# Altium PCB 复件 PCB3.PcbDoc
Units mil, origin at the board's own origin, x right, y up, seen from the top; angles counter-clockwise.
Board outline 3977.39 x 3970.06 mil, 2 copper layers (Top Layer, Bottom Layer); 98 components, 76 nets, 361 pads, 8 vias.
Unrouted connection lines stored in the file: 220.
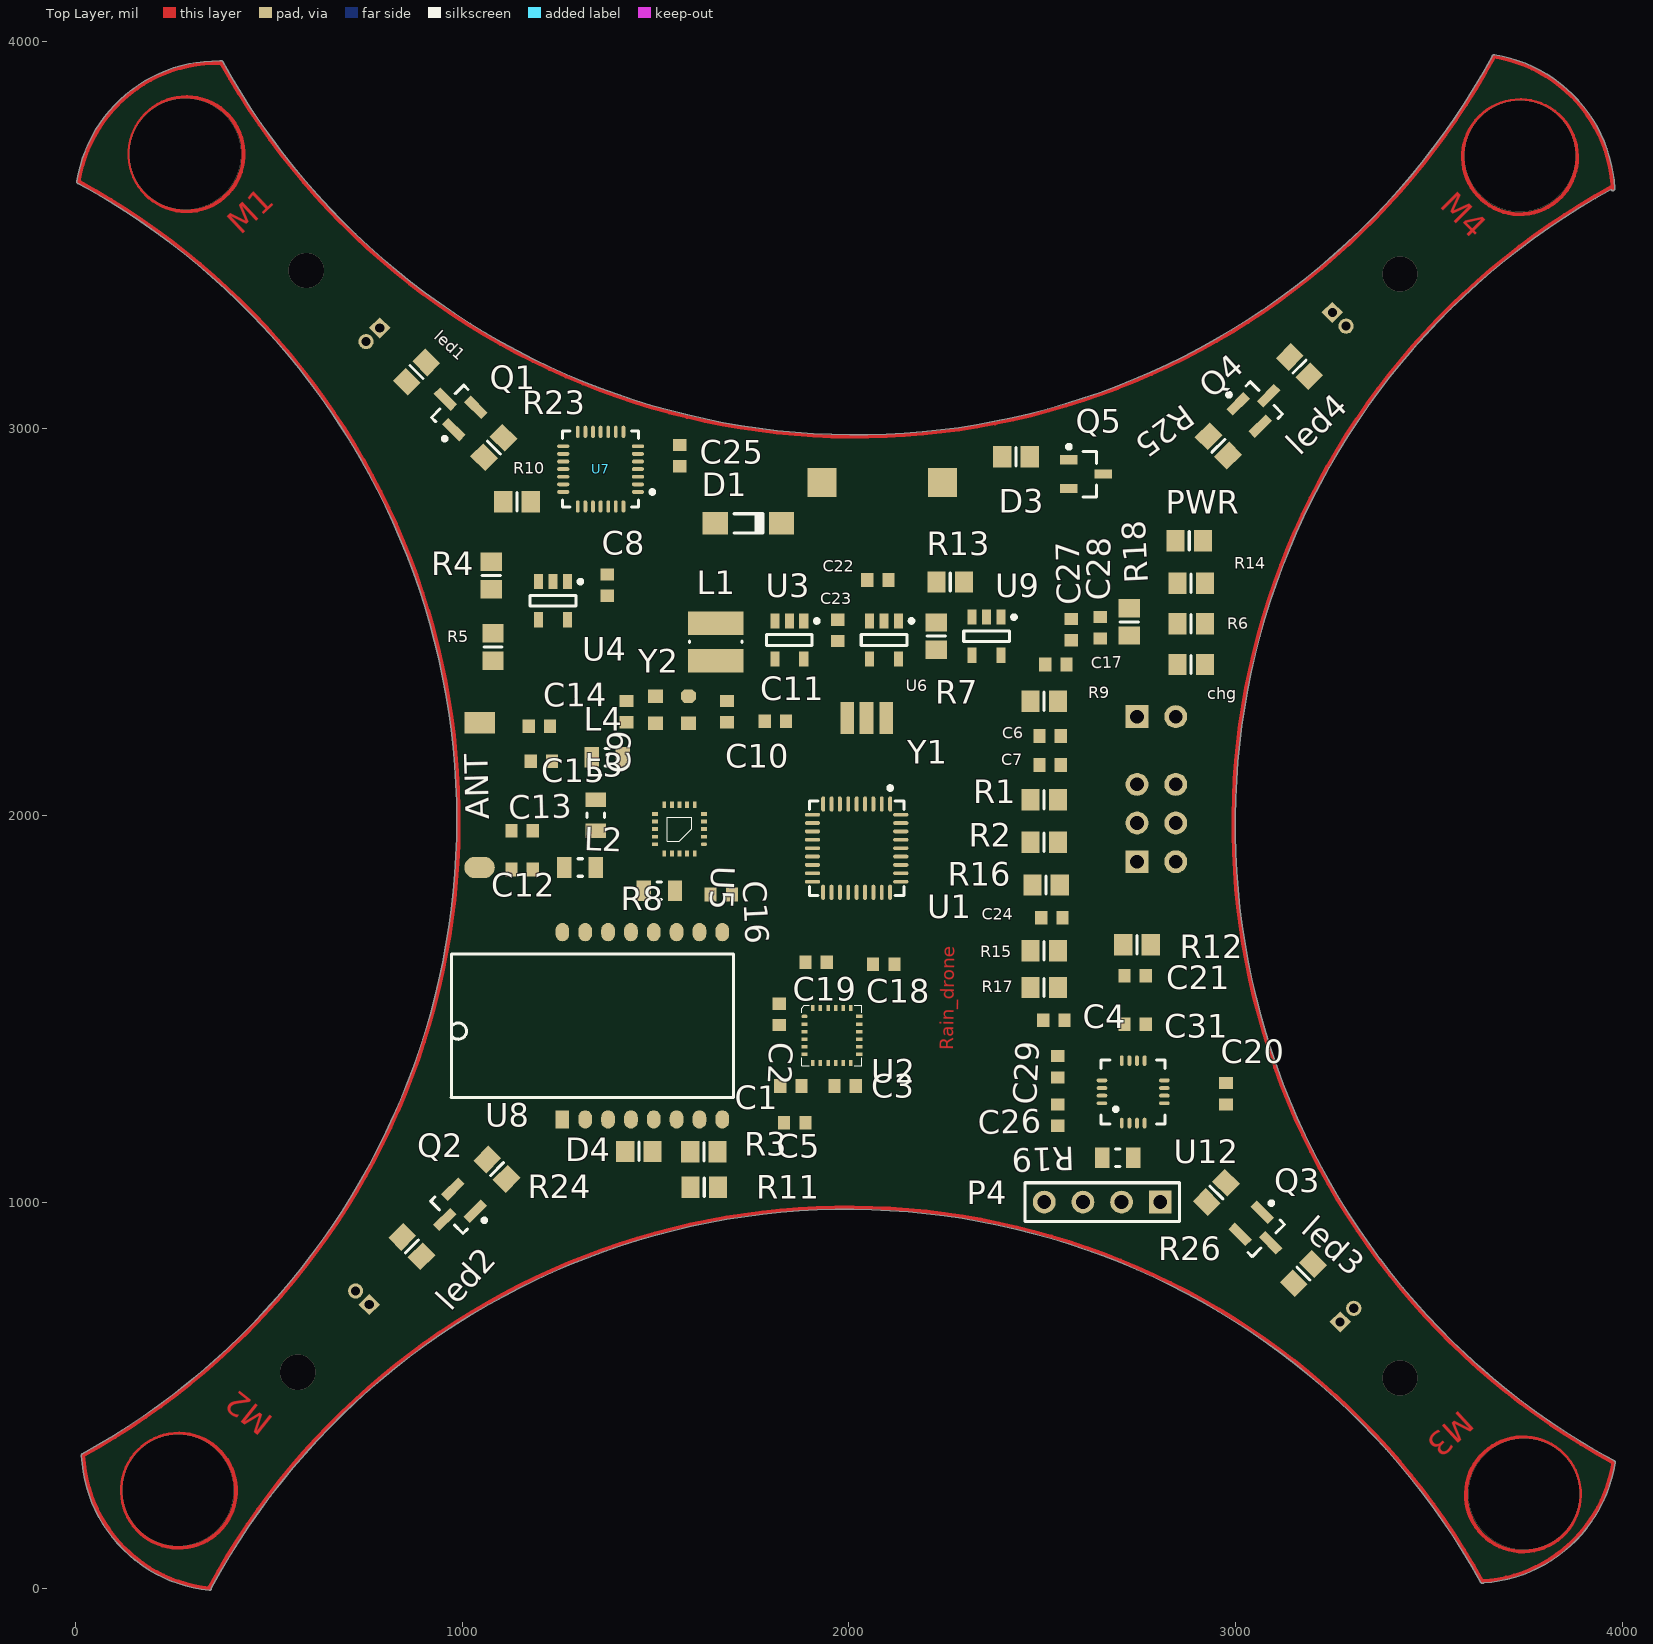
[diagram p0: Top Layer view]
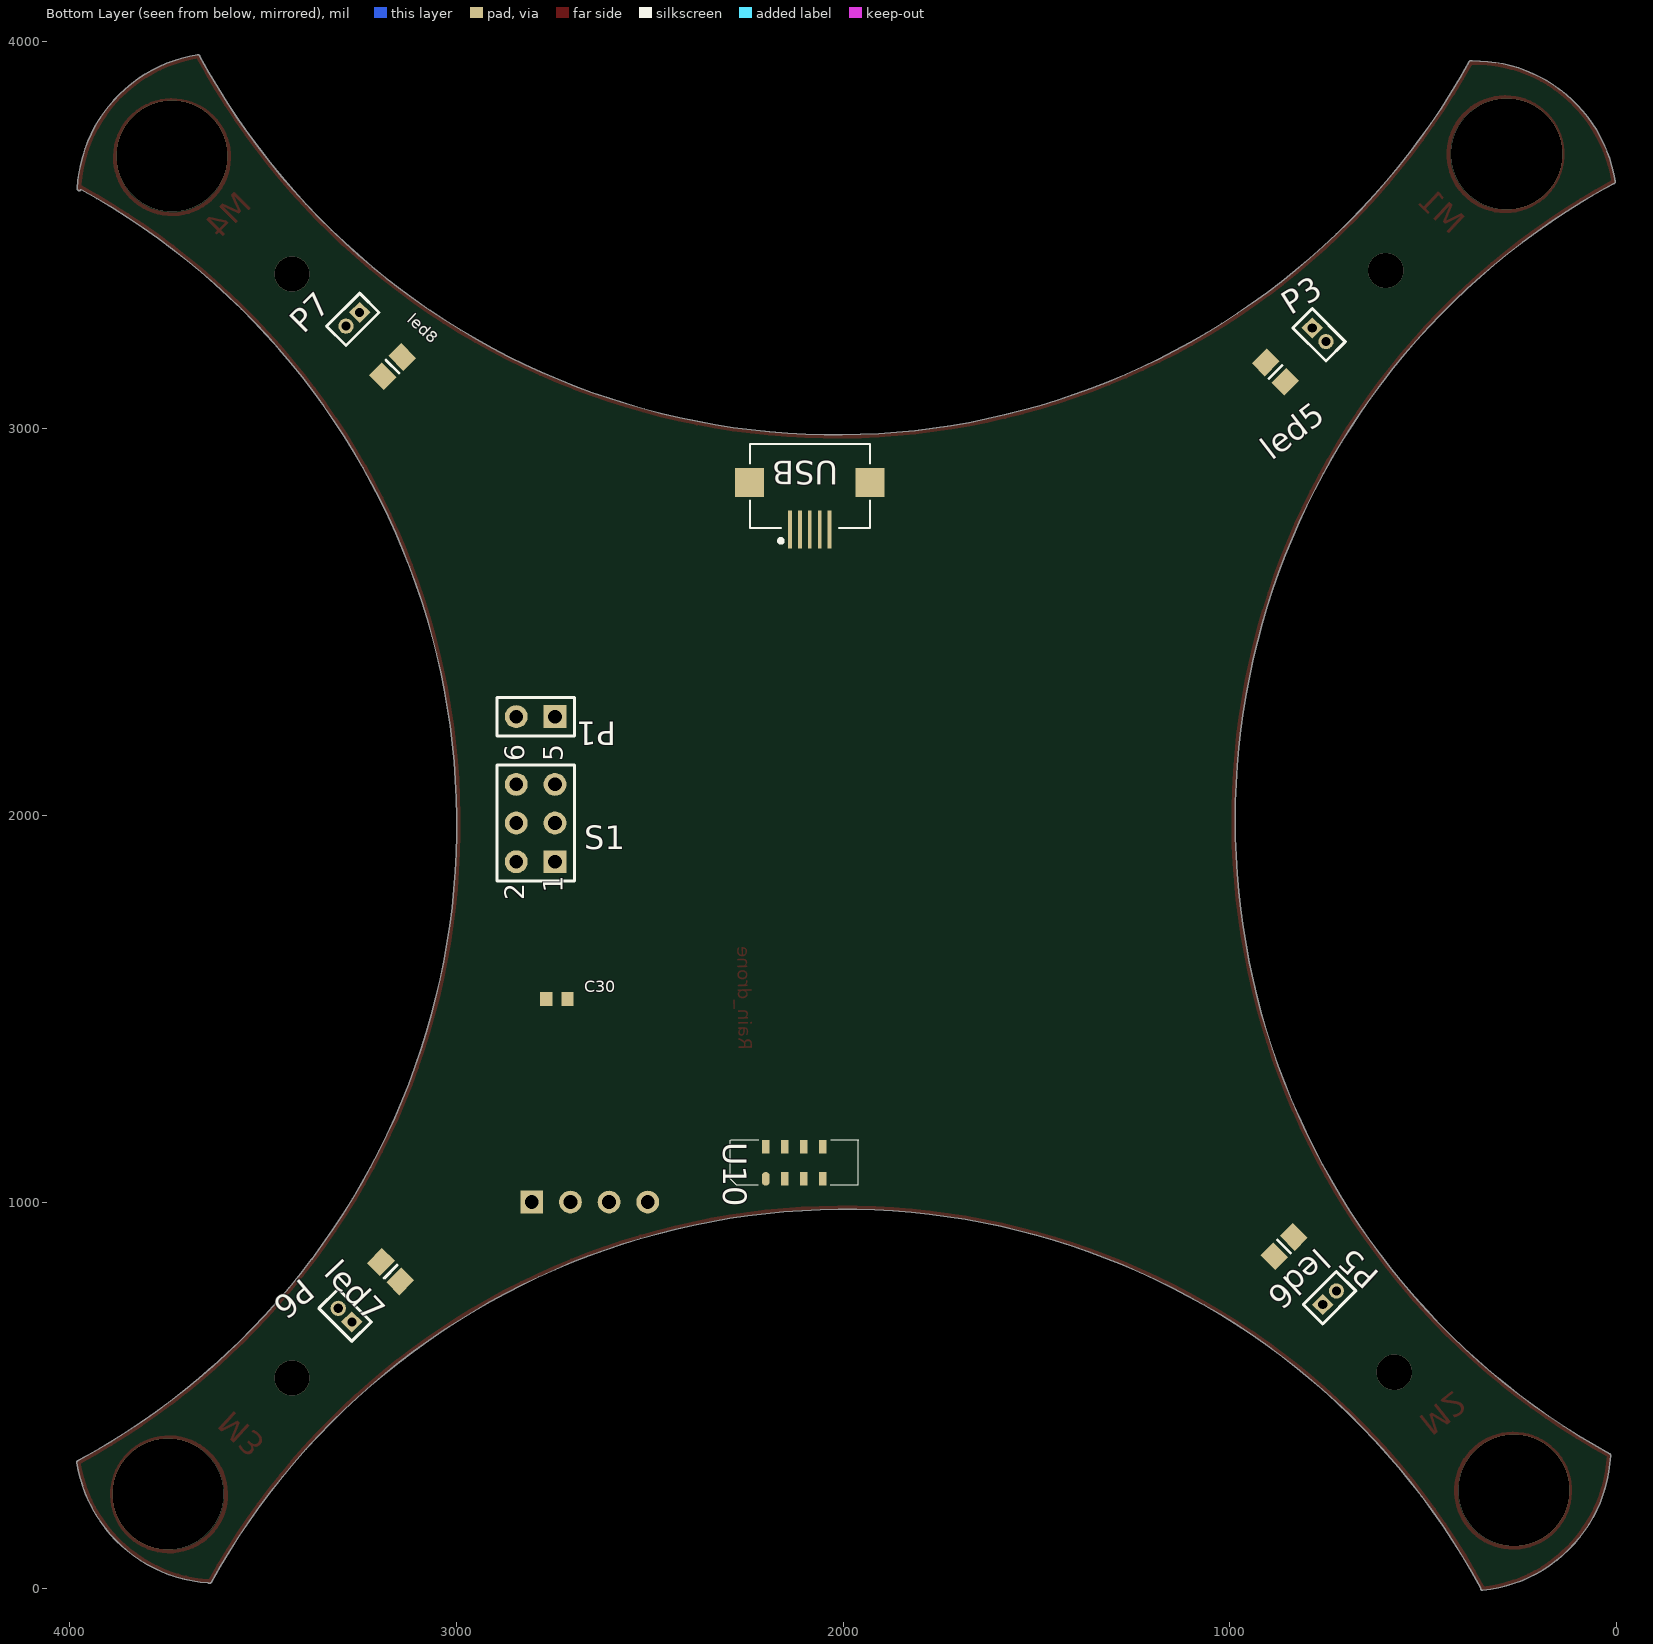
[diagram p1: Bottom Layer view, seen from below]

## Layer stack, top to bottom
Top Layer: signal copper 1.4
Dielectric: dielectric 12.6, FR-4, Dk 4.8
Bottom Layer: signal copper 1.4

## Board outline
351.69,2.62 ccw(c347.3,5.04) 351.7,2.65 cw(c1996.65,-890.35) 3633.79,16.85 ccw(c3638.18,19.28) 3641.28,15.34 ccw(c3616.87,383.21) 3981.14,326.33 ccw(c3976.18,327.11) 3981.2,327.11 ccw(c3976.18,327.11) 3976.62,332.1 cw(c4870.35,1976.65) 3970.48,3617.83 ccw(c3975,3620) 3980.02,3620 ccw(c3975,3620) 3980.01,3620.25 ccw(c3611.79,3601.87) 3668.67,3966.14 ccw(c3667.89,3961.18) 3662.9,3961.62 cw(c2018.35,4855.35) 380.85,3948.78 ccw(c376.47,3946.36) 373.54,3950.43 ccw(c368.13,3581.79) 3.86,3638.67 ccw(c8.82,3637.89) 8.38,3632.9 cw(c-885.35,1988.35) 986.35,1988.35 cw(c-885.35,1988.35) 18.23,349.2 ccw(c20.62,344.8) 15.62,344.55 ccw(c383.84,362.93) 346.39,-3.85 ccw(c346.9,1.14) 351.91,1.14 ccw(c346.9,1.14)

## Design rules (kind name [scope] priority, off if disabled: settings)
Clearance [All] p1: gap=6
PasteMaskExpansion [All] p1: expansion=3
PlaneClearance [All] p1: clearance=3
PolygonConnect [All] p1: connectstyle=Relief reliefconductorwidth=10 reliefentries=4 polygonreliefangle="90 Angle"
RoutingCorners [All] p1: cornerstyle=45-Degree minsetback=100 maxsetback=50
RoutingVias [All] p1: holewidth=12 width=24 viastyle="Through Hole" minholewidth=12 minwidth=24 maxholewidth=12 maxwidth=24
SMDNeckDown [All] p1: percent=70.000
SilkToSilkClearance [All] p1: silktosilkclearance=0
SilkscreenOverComponentPads [All] p1: minsilkscreentomaskgap=0
SolderMaskExpansion [All] p1: expansion=3
Width [All] p1: maxlimit=10 minlimit=6 preferedwidth=10
23 further rules are at their usual default settings.

## Classes and differential pairs
component class Sheet2: ANT C1 C2 C3 C4 C5 C6 C7 C8 C9 C10 C11 C12 C13 C14 C15 C16 C17 C18 C19 C20 C21 C22 C23 C24 chg D1 D3 L1 L2 L3 L4 P1 P3 P4 P5 P6 P7 PWR Q1 Q2 Q3 Q4 R1 R2 R4 R5 R6 R7 R8 R9 R14 R15 R16 R17 R23 R24 R25 R26 S1 U1 U2 U3 U4 U5 U6 USB Y1 Y2
component class Sheet3: C25 C26 C27 C28 C29 C30 C31 D4 led1 led2 led3 led4 led5 led6 led7 led8 Q5 R3 R10 R11 R12 R13 R18 R19 U7 U8 U9 U10 U12

## Components (designator, comment, footprint, x,y, rotation, side; value= is the part's Value field where it differs from the comment)
ANT "U11" AN9520-245 1040,2065 r180 top
C1 "1uf" 1608[0603] 1850,1300 r0 top
C2 "2.2nf" 1608[0603] 1820,1485 r90 top
C3 "0.1uf" 1608[0603] 1990,1300 r0 top
C4 "104" 1608[0603] 2530,1470 r0 top
C5 "1uf" 1608[0603] 1860,1205 r0 top
C6 "104" 1608[0603] 2520,2205 r180 top
C7 "2.2uF" 1608[0603] 2520,2130 r180 top
C8 "220PF" 1608[0603] 1375,2595 r270 top
C9 "22p" 1608[0603] 1425,2268 r90 top
C10 "22p" 1608[0603] 1685,2268.22 r90 top
C11 "10uf" 1608[0603] 1810,2243.22 r180 top
C12 "1.5pF" 1608[0603] 1155,1860 r0 top
C13 "1pF" 1608[0603] 1155,1960 r180 top
C14 "2.2nF" 1608[0603] 1200,2230 r0 top
C15 "4.7pF" 1608[0603] 1205,2140 r0 top
C16 "33nF" 1608[0603] 1670,1795 r0 top
C17 "2.2uF" 1608[0603] 2535,2390 r180 top
C18 "104" 1608[0603] 2090,1615 r0 top
C19 "2.2uF" 1608[0603] 1915,1620 r0 top
C20 "10UF" 1608[0603] 2975,1280 r90 top
C21 "104" 1608[0603] 2740,1585 r180 top
C22 "104" 1608[0603] 2075,2608.22 r0 top
C23 "1uF" 1608[0603] 1971,2478.22 r270 top
C24 "1uF" 1608[0603] 2525,1735 r0 top
C25 "2.2uF" 1608[0603] 1563,2930 r90 top
C26 "2.2uF" 1608[0603] 2540,1225 r270 top
C27 "104" 1608[0603] 2575,2480 r90 top
C28 "2.2uF" 1608[0603] 2650,2485 r90 top
C29 "0.1uF" 1608[0603] 2540,1350 r90 top
C30 "4.7uF" 1608[0603] 2740,1525 r180 bottom
C31 "0.22uF" 1608[0603] 2740,1460 r180 top
chg "LED" 6-0805_N 2885,2390 r180 top
D1 "MBR0520" CAPCP5113X06N 1740,2755 r180 top
D3 "1N4148" 6-0805_N 2432,2927 r0 top
D4 "sta" 6-0805_N 1457,1131 r180 top
L1 "10UH" INDC3035X06N 1656,2448.22 r90 top
L2 "3.9nH" 0805 1305,1865 r0 top
L3 "8.2nH" 0805 1345,2000 r270 top
L4 "2.7nH" 0805 1375,2150 r180 top
led1 "LED" 6-0805_N 881.97,3146 r45 top
led2 "LED" 6-0805_N 870,885 r135 top
led3 "LED" 6-0805_N 3175,815 r225 top
led4 "LED" 6-0805_N 3165,3160 r315 top
led5 "LED" 6-0805_N 881.97,3146 r45 bottom
led6 "LED" 6-0805_N 860,885 r135 bottom
led7 "LED" 6-0805_N 3170,820 r225 bottom
led8 "LED" 6-0805_N 3165,3160 r315 bottom
P1 "Header 2" HDR1X2 2745,2255 r0 bottom
P3 "Motor1" MHDR1X2 786.97,3260 r225 bottom
P4 "SWD" HDR1X4 2805,1000 r180 top
P5 "Motor2" MHDR1X2 760,735 r135 bottom
P6 "Motor3" MHDR1X2 3270,690 r45 bottom
P7 "Motor" MHDR1X2 3250,3300 r315 bottom
PWR "LED" 6-0805_N 2880,2710 r180 top
Q1 "SI2302" SI2302 981.97,3051 r135 top
Q2 "SI2302" SI2302 980,980 r225 top
Q3 "SI2302" SI2302 3065,920 r315 top
Q4 "SI2302" SI2302 3060,3060 r45 top
Q5 "S8050" SOT-23B_N 2613,2882 r0 top
R1 "3K" 6-0805_N 2505,2040 r180 top
R2 "3K" 6-0805_N 2505,1930 r180 top
R3 "100k" 6-0805_N 1625,1130 r180 top
R4 "33K" 6-0805_N 1075,2620 r270 top
R5 "10K" 6-0805_N 1080,2435 r90 top
R6 "100R" 6-0805_N 2885,2495 r180 top
R7 "1.65K" 6-0805_N 2226,2463.22 r270 top
R8 "22K" 0805 1510,1805 r0 top
R9 "10K" 6-0805_N 2505,2295 r0 top
R10 "360R" 6-0805_N 1142,2811 r0 top
R11 "360R" 6-0805_N 1626,1038 r0 top
R12 "360R" 6-0805_N 2745,1665 r0 top
R13 "360R" 6-0805_N 2262,2603.22 r0 top
R14 "1.65K" 6-0805_N 2885,2600 r0 top
R15 "33K" 6-0805_N 2505,1650 r0 top
R16 "3K" 6-0805_N 2510,1820 r0 top
R17 "33K" 6-0805_N 2505,1555 r0 top
R18 "10K" 6-0805_N 2725,2500 r270 top
R19 "3K" 0805 2695,1115 r0 top
R23 "10K" 6-0805_N 1081.97,2951 r45 top
R24 "33K" 6-0805_N 1090,1085 r135 top
R25 "33k" 6-0805_N 2955,2955 r315 top
R26 "33k" 6-0805_N 2950,1025 r225 top
S1 "SW-SPDT" HDR2X3 2745,1880 r90 bottom
U1 "STM32F10T8U6" stm32f1038tu6 2020,1915 r270 top
U2 "MPU6050" U8 1885,1480 r0 top
U3 "MIC5205-3.3" SOT95P280X120-5N 1846,2453.22 r270 top
U4 "LM27313" SOT95P280X120-5N 1235,2555 r270 top
U5 "Component_1" "U2 - duplicate2" 1625,1925 r180 top
U6 "LTC4054" SOT95P280X120-5N 2091,2453.22 r270 top
U7 "CP2102" cp2102 1358,2895 r180 top
U8 "HM-06" HM-11 1400,1445 r90 top
U9 "MIC5205-3.3" SOT95P280X120-5N 2356,2463.22 r270 top
U10 "Component_1" "U6 - duplicate1" 2200,1060 r90 bottom
U12 "Component_1" a 2735,1285 r90 top
USB "Header 5" USB_MICRO_B 2086,2739 r90 bottom
Y1 "XTAL8M" CAPC1219X07N 2071,2252 r180 top
Y2 "Component_1" XTAL16MHz 1585,2313 r180 top

## Footprints (in the part's own frame and the unit in brackets; to place one, negate y for a bottom-side part, rotate by r counter-clockwise, add the part's x,y. Pads: shape width x height; smd on the part's side, far side on the other; paste and mask are expansions set on the pad)
6-0805_N [mm]
  rect 1.2x1.4 smd: 1(-0.9,0) 2(0.9,0)
  silkscreen extent 0,-0.6 0,0.6, body extent -1.07,-0.7 1.07,0.7, height 0.7
0805 [mm] "Chip Capacitor, 2-Leads, Body 2.0x1.2mm, IPC Medium Density"
  rect 0.95x1.35 smd: 1(-1.025,0) 2(1.025,0)
  silkscreen extent -0.15,-0.58 0.15,0.58, body extent -1.05,-0.65 1.05,0.65, height 0.5
1608[0603] [mm] "Chip Capacitor, Body 1.6x0.8mm, IPC High Density"
  rect 0.8x0.9 smd: 1(-0.7,0) 2(0.7,0)
  body extent -0.87,-0.48 0.87,0.48, height 1.3
a [mm] "QFN, 16-Leads, Body 4.2x4.2mm (max), Pitch 0.50mm, IPC Medium Density"
  oval 0.7x0.25 smd: 1(-2.05,0.75) 2(-2.05,0.25) 3(-2.05,-0.25) 4(-2.05,-0.75) 9(2.05,-0.75) 10(2.05,-0.25) 11(2.05,0.25) 12(2.05,0.75)
  oval 0.25x0.7 smd: 5(-0.75,-2.05) 6(-0.25,-2.05) 7(0.25,-2.05) 8(0.75,-2.05) 13(0.75,2.05) 14(0.25,2.05) 15(-0.25,2.05) 16(-0.75,2.05)
  silkscreen extent -2.1,-2.1 2.1,2.1
AN9520-245 [mm]
  oval 2x1.4 smd: 1(-0.127,5.08)
  rect 2x1.4 smd: 2(-0.127,-4.42)
CAPC1219X07N [mm] "Chip Capacitor, 2-Leads, Body 1.2x1.9mm, IPC Medium Density"
  rect 0.9x2.1 smd: 1(-0.65,0) 2(0.65,0) 3(1.905,0)
  body extent 0.03,-2.05 1.29,-0.05, height 0.7
CAPCP5113X06N [mm] "Chip Capacitor, 2-Leads, Body 5.1x1.3mm, IPC Medium Density"
  rect 1.65x1.45 smd: 1(-2.175,0) 2(2.175,0)
  silkscreen extent -0.95,-0.62 0.95,0.62, body extent -2.6,-0.7 2.6,0.7, height 0.6
cp2102 [mm]
  oval 0.8x0.25 smd: 1(-2.45,1.5) 2(-2.45,1) 3(-2.45,0.5) 4(-2.45,0) 5(-2.45,-0.5) 6(-2.45,-1) 7(-2.45,-1.5) 15(2.45,-1.5) 16(2.45,-1) 17(2.45,-0.5) 18(2.45,0) 19(2.45,0.5) 20(2.45,1) 21(2.45,1.5)
  oval 0.25x0.8 smd: 8(-1.5,-2.45) 9(-1,-2.45) 10(-0.5,-2.45) 11(0,-2.45) 12(0.5,-2.45) 13(1,-2.45) 14(1.5,-2.45) 22(1.5,2.45) 23(1,2.45) 24(0.5,2.45) 25(0,2.45) 26(-0.5,2.45) 27(-1,2.45) 28(-1.5,2.45)
  silkscreen extent -3.53,-2.5 2.5,2.5, body extent -2.5,-2.5 2.5,2.5, height 1
HDR1X2 [mm] "Connector; Header; 2 Position"
  rect 1.5x1.5 hole 0.9: 1(0,0)
  round 1.5 hole 0.9: 2(2.54,0)
  silkscreen extent -1.27,-1.27 3.81,1.27
HDR1X4 [mm] "Connector; Header; 4 Position"
  rect 1.5x1.5 hole 0.9: 1(0,0)
  round 1.5 hole 0.9: 2(2.54,0) 3(5.08,0) 4(7.62,0)
  silkscreen extent -1.27,-1.27 8.89,1.27
HDR2X3 [mm] "Connector; He"
  rect 1.5x1.5 hole 0.9: 1(0,0)
  round 1.5 hole 0.9: 2(0,2.54) 3(2.54,0) 4(2.54,2.54) 5(5.08,0) 6(5.08,2.54)
  silkscreen extent -1.27,-1.27 6.35,3.81
HM-11 [mm]
  rect 1.2x0.9 smd: 1(-5.875,3.575)
  oval 1.2x0.9 smd: 2(-5.875,2.075) 3(-5.875,0.575) 4(-5.875,-0.925) 5(-5.875,-2.425) 6(-5.875,-3.925) 7(-5.875,-5.425) 8(-5.875,-6.925) 9(6.425,-6.925) 10(6.425,-5.425) 11(6.425,-3.925) 12(6.425,-2.425) 13(6.425,-0.925) 14(6.425,0.575) 15(6.425,2.075) 16(6.425,3.575)
  silkscreen extent -4.45,-7.68 4.99,10.88
INDC3035X06N [mm] "Chip Inductor, 2-Leads, Body 3.0x3.5mm, IPC Medium Density"
  rect 1.55x3.65 smd: 1(-1.225,0) 2(1.225,0)
  silkscreen extent -0.05,-1.73 0.05,1.73, body extent -1.55,-1.8 1.55,1.8, height 0.6
MHDR1X2 [mm] "Connector; Header; 2 Position"
  rect 1x1 hole 0.6: 1(0,0)
  round 1 hole 0.6: 2(1.27,0)
  silkscreen extent -0.9,-0.9 2.17,0.9
SI2302 [mm]
  rect 1.6x0.6 smd: D(0.9,0) G(-0.9,1.03) S(-0.9,-1.03)
  silkscreen extent -1.02,-1.5 0.7,2, body extent -0.7,-1.52 0.7,1.52, height 1.12
SOT95P280X120-5N [mm] "SOT23, 5-Leads, Body 3.0x3.0mm (max), Pitch 0.95mm, IPC Medium Density"
  rect 1x0.6 smd: 1(-1.25,0.95) 2(-1.25,0) 3(-1.25,-0.95) 4(1.25,-0.95) 5(1.25,0.95)
  silkscreen extent -1.37,-1.5 0.35,1.93, body extent -0.85,-1.5 0.85,1.5, height 1.2
SOT-23B_N [mm] "SOT23, 3-Leads, Body 2.9x1.3mm, Pitch 0.95mm, Lead Span 2.4mm, IPC Medium Density"
  rect 1.15x0.6 smd: 1(-1.125,0.95) 2(-1.125,-0.95) 3(1.125,0)
  silkscreen extent -1.25,-1.5 0.7,1.92, body extent -0.7,-1.5 0.7,1.5, height 1.14
stm32f1038tu6 [mm] "QFN, 36-Leads, Body 6.1x6.1mm (max), Pitch 0.55mm, IPC Medium Density"
  oval 1x0.25 smd: 1(-2.9,2.2) 2(-2.9,1.65) 3(-2.9,1.1) 4(-2.9,0.55) 5(-2.9,0) 6(-2.9,-0.55) 7(-2.9,-1.1) 8(-2.9,-1.65) 9(-2.9,-2.2) 19(2.9,-2.2) 20(2.9,-1.65) 21(2.9,-1.1) 22(2.9,-0.55) 23(2.9,0) 24(2.9,0.55) 25(2.9,1.1) 26(2.9,1.65) 27(2.9,2.2)
  oval 0.25x1 smd: 10(-2.2,-2.9) 11(-1.65,-2.9) 12(-1.1,-2.9) 13(-0.55,-2.9) 14(0,-2.9) 15(0.55,-2.9) 16(1.1,-2.9) 17(1.65,-2.9) 18(2.2,-2.9) 28(2.2,2.9) 29(1.65,2.9) 30(1.1,2.9) 31(0.55,2.9) 32(0,2.9) 33(-0.55,2.9) 34(-1.1,2.9) 35(-1.65,2.9) 36(-2.2,2.9)
  silkscreen extent -4.07,-3.1 3.1,3.1, body extent -3.06,-3.06 3.06,3.06, height 1
"U2 - duplicate2" [mm]
  oval 0.4x0.25 smd: 1(0,0)
  rect 0.4x0.25 smd: 2(0,-0.5) 3(0,-1) 4(0,-1.5) 5(0,-2) 11(3.2,-2) 12(3.2,-1.5) 13(3.2,-1) 14(3.2,-0.5) 15(3.2,0)
  rect 0.25x0.4 smd: 6(0.6,-2.6) 7(1.1,-2.6) 8(1.6,-2.6) 9(2.1,-2.6) 10(2.6,-2.6) 16(2.6,0.6) 17(2.1,0.6) 18(1.6,0.6) 19(1.1,0.6) 20(0.6,0.6)
  silkscreen extent 0.81,-1.79 2.39,-0.21
"U6 - duplicate1" [mm]
  oval 0.9x0.5 smd: 1(0,0)
  rect 0.9x0.5 smd: 2(0,-1.25) 3(0,-2.5) 4(0,-3.75) 5(2.1,-3.75) 6(2.1,-2.5) 7(2.1,-1.25) 8(2.1,0)
  silkscreen extent -0.42,-6.1 2.54,2.33
U8 [mm]
  oval 0.4x0.23 smd: 1(0,0)
  rect 0.4x0.23 smd: 2(0,-0.5) 3(0,-1) 4(0,-1.5) 5(0,-2) 6(0,-2.5) 13(3.6,-2.5) 14(3.6,-2) 15(3.6,-1.5) 16(3.6,-1) 17(3.6,-0.5) 18(3.6,0)
  rect 0.23x0.4 smd: 7(0.55,-3.05) 8(1.05,-3.05) 9(1.55,-3.05) 10(2.05,-3.05) 11(2.55,-3.05) 12(3.05,-3.05) 19(3.05,0.55) 20(2.55,0.55) 21(2.05,0.55) 22(1.55,0.55) 23(1.05,0.55) 24(0.55,0.55)
  silkscreen extent -0.18,-3.22 3.77,0.73
USB_MICRO_B [mm]
  rect 2.5x0.25 smd: 1(0,-1.3) 2(0,-0.65) 3(0,0) 4(0,0.65) 5(0,1.3)
  rect 1.9x1.9 all layers, no hole: ""(3.095,-3.95) ""(3.095,3.95)
  silkscreen extent -0.87,-3.94 5.6,3.94, body extent 0.24,-4 5.67,3.98, height 2.71
XTAL16MHz [mm] "无"
  oct 1x0.9 smd: 1(0,0.127)
  rect 1x0.9 smd: 2(2.159,0.127) 3(2.159,1.905) 4(0,1.905)

## Part data
ANT: library part Component_1
C1 C2 C3 C4 C5 C6 C7 C8 C9 C10 C11 C12 C13 C14 C15 C16 C17 C18 C19 C20 C21 C22 C23 C24 C25 C26 C27 C28 C29 C30 C31: library part "Cap Semi", "Capacitor (Semiconductor SIM Model)"
chg led1 led2 led3 led4 led5 led6 led7 led8 PWR: library part LED2, "Typical RED, GREEN, YELLOW, AMBER GaAs LED"
D1: library part "D Zener", "Zener Diode"
D3 D4: library part Diode, "Default Diode"
L1 L2 L3 L4: library part Inductor, "Inductor"
P1: "Header, 2-Pin"
P3 P5 P6 P7: library part MHDR1X2, "Header, 2-Pin"
P4: library part "Header 4", "Header, 4-Pin"
Q5: library part QNPN, "NPN Bipolar Transistor"
R1 R2 R3 R4 R5 R6 R7 R9 R10 R11 R12 R13 R14 R15 R16 R17 R18 R23 R24 R25 R26: library part "Res Thermal"
R8 R19: library part Res3, "Resistor"
S1: "SPDT Subminiature Toggle Switch, Right Angle Mounting, Vertical Actuation"
U8: library part bluetooth
USB: "Header, 5-Pin"

## Via types
v1: diameter 287.4, hole 287.4, Top Layer to Bottom Layer, 4 vias
v2: diameter 90.55, hole 90.55, Top Layer to Bottom Layer, 4 vias

## Nets (pads, with @x,y where several pads share a name; then routed paths per layer and width w, separated by ;. In a path a pad name is that pad's centre, name@x,y a point inside that pad or via, vN(x,y) a via of type N, cw(c..) or ccw(c..) an arc to the next point about the centre after c; other vN are vias at no path point)
AUXDA: U2.6 U10.7 U12.16
AUXDL: U2.7 U10.8
AUXDL1: U12.1
BAT: P1.2 S1.2
BAT_CHECK: U1.15
BOOT0: U1.35
BT_EN: U1.17 U9.3
CE: U1.24 U5.1
CHG5V: C11.1 D3.1 U6.4 U7.7 U7.8 USB.1
CSN: U1.11 U5.2
D+: U7.4 USB.3
D-: U7.5 USB.2
GND: C1.2 C2.1 C3.2 C4.2 C5.2 C6.2 C7.2 C9.2 C10.1 C11.2 C13.1 C14.1 C15.1 C16.1 C17.1 C18.1 C19.1 C20.1 C21.1 C22.2 C23.2 C24.2 C25.1 C26.1 C27.2 C28.2 C29.1 C30.1 D4.2 led1.2 led2.2 led3.2 led4.2 led5.2 led6.2 led7.2 led8.2 P1.1 P4.1 PWR.2 Q1.S Q2.S Q3.S Q4.S Q5.3 R5.1 R7.1 R8.2 R17.2 R23.2 R24.2 R25.2 R26.2 U1.5 U1.18 U1.26 U1.36 U2.1 U2.9 U2.11 U2.15 U2.17 U2.18 U3.2 U4.2 U5.8 U5.14 U5.17 U5.20 U6.2 U7.3 U8.12 U9.2 U10.3 U10.4 U10.5 U12.9 U12.11 USB.5 Y1.3 Y2.2 Y2.4
HM_INT: R19.1 U1.31 U12.15
IIC_SCL: R2.2 U1.33 U2.23
IIC_SDA: R1.2 U1.34 U2.24
MISO: U1.13 U5.5
MOSI: U1.14 U5.4
MP_INT: R16.1 U1.32 U2.12
NetANT_1: ANT.1 C12.1 C13.2
NetC2_2: C2.2 U2.20
NetC3_1: C3.1 U2.10
NetC8_2: C8.2 R4.2 R5.2 U4.3
NetC9_1: C9.1 U5.10 Y2.3
NetC10_2: C10.2 U5.9 Y2.1
NetC12_2: C12.2 L2.1
NetC14_2: C14.2 C15.2 L4.1 U5.11
NetC16_2: C16.2 U5.19
NetC24_1: C24.1 R15.1 R17.1
NetC25_2: C25.2 U7.6
NetC30_2: C30.2 U12.10
NetC31_1: C31.1 U12.8
NetC31_2: C31.2 U12.12
Netchg_2: chg.2 R6.1
NetD1_1: D1.1 L1.2 U4.1
NetD4_1: D4.1 R3.2
NetL2_2: L2.2 L3.2 U5.13
NetL3_1: L3.1 L4.2 U5.12
Netled1_1: led1.1 led5.1 R10.1
Netled2_1: led2.1 led6.1 R11.1
Netled3_1: led3.1 led7.1 R12.2
Netled4_1: led4.1 led8.1 R13.2
NetPWR_1: PWR.1 R14.2
NetQ1_G: Q1.G R23.1
NetQ2_G: Q2.G R24.1
NetQ3_G: Q3.G R26.1
NetQ4_G: Q4.G R25.1
NetQ5_1: Q5.1 R18.2
NetQ5_2: Q5.2 U7.28
NetR3_1: R3.1 U8.15
NetR6_2: R6.2 U6.1
NetR7_2: R7.2 U6.5
NetS1_3: S1.3 U6.3
NetU1_2: U1.2 Y1.1
NetU1_3: U1.3 Y1.2
"NRF IRQ": U5.6
NRF_IRQ: U1.29
PA8: R11.2 U1.20
PA11: R10.2
PALL: U1.23
PB1: R12.1 U1.16
PB3: R13.1 U1.30
PWMA: U1.7
PWMB: U1.8
PWMC: U1.9
PWMD: U1.10
RESET: C17.2 R9.1 U1.4 U7.24
SCK: U1.12 U5.3
SWCLK: P4.4 U1.28
SWDIO: P4.3 U1.25
USART1_RX: U1.22 U7.26
USART1_TX: U1.21 U7.25
VCC3.3: C1.1 C4.1 C5.1 C6.1 C7.1 C18.2 C19.2 C26.2 C29.2 P4.2 R1.1 R2.1 R8.1 R9.2 R14.1 R16.2 R19.2 U1.1 U1.6 U1.19 U1.27 U2.3 U2.8 U2.13 U3.5 U5.7 U5.15 U5.16 U5.18 U10.1 U10.2 U12.2 U12.13
VCC3.3BT: C27.1 C28.1 U8.9 U9.5
VCC3.7: C20.2 C21.2 L1.1 P3.1 P5.1 P6.1 P7.1 R15.2 S1.1 U4.4 U4.5
VCC5: C8.1 C22.1 C23.1 D1.2 D3.2 R4.1 U3.1 U3.3 U9.1
pads on no net: ANT.2 chg.1 P3.2 P5.2 P6.2 P7.2 Q1.D Q2.D Q3.D Q4.D R18.1 S1.4 S1.5 S1.6 U2.2 U2.4 U2.5 U2.14 U2.16 U2.19 U2.21 U2.22 U3.4 U7.1 U7.2 U7.9 U7.10 U7.11 U7.12 U7.13 U7.14 U7.15 U7.16 U7.17 U7.18 U7.19 U7.20 U7.21 U7.22 U7.23 U7.27 U8.1 U8.2 U8.3 U8.4 U8.5 U8.6 U8.7 U8.8 U8.10 U8.11 U8.13 U8.14 U8.16 U9.4 U10.6 U12.3 U12.4 U12.5 U12.6 U12.7 U12.14 USB. USB.4
copper on no net: | length 21798.3
  Top Layer w10: 8.82,3637.89 cw(c368.13,3581.79) 374.72,3945.39 ; 10.04,3637.7 cw(c-885.35,1988.35) 20.62,344.8 ccw(c383.84,362.93) 346.9,1.14 ; 140,3715 ccw(c287.53,3709.32) 140.12,3717.51 ; 347.3,5.04 cw(c1996.65,-890.35) 3638.18,19.28 ; 376.47,3946.36 ccw(c2018.35,4855.35) 3667.7,3959.96 ; 413.38,229.5 cw(c267.75,253.77) 414.09,234.26 ; 3638.13,20.17 ccw(c3616.87,383.21) 3976.18,327.11 ; 3667.89,3961.18 cw(c3611.79,3601.87) 3975,3620 ; 3879.58,188.95 cw(c3742.7,244.28) 3880,190 ; 3879.63,3732.03 ccw(c3735.16,3701.61) 3879.93,3730.57 ; 3972.47,3624.64 ccw(c4870.35,1976.65) 3974.96,327.3
  other v1: 3745,245 265,255 3735,3705 284,3710
  other v2: 3425,545 575,560 3425,3400 597,3408

## Other copper
Top Layer:
  text "M4" at 3525,3575 h60 r315
  text "M1" at 428,3498 h60 r43.13
  text "Rain_drone" at 2281,1393 h60 r89.17
  text "M3" at 3580,465 h60 r222.56
  text "M2" at 515,440 h60 r141.55

## Text inside footprints (layer, text, board x,y; h text height)
S1: Bottom Overlay "1" at 2725,1800 h50 r270; Bottom Overlay "2" at 2825,1780 h50 r270; Bottom Overlay "5" at 2725,2140 h50 r270; Bottom Overlay "6" at 2825,2140 h50 r270